# EAGLE board ADP1614_BREAKOUT (EAGLE 7.7.0)
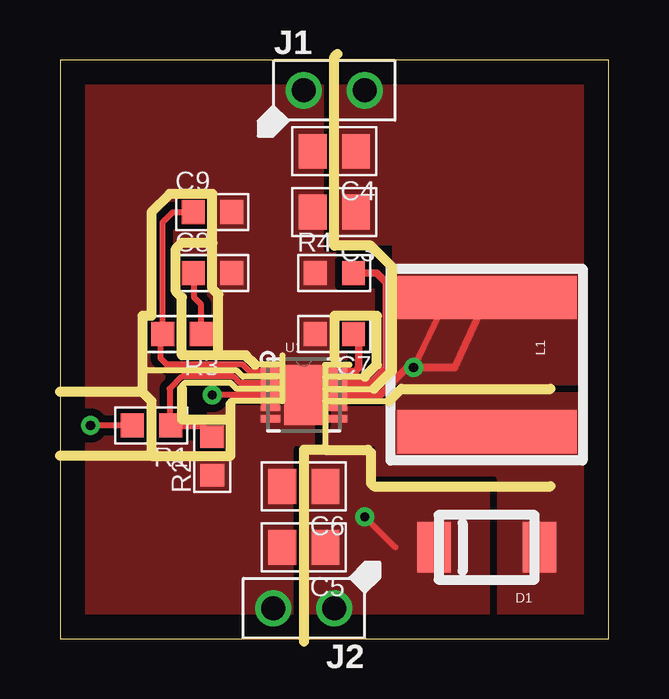
[diagram p0: board, top side]
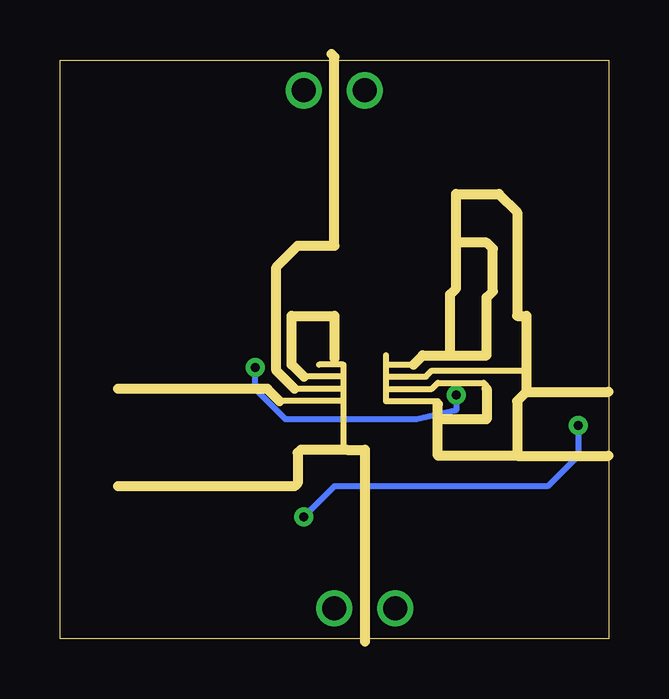
[diagram p1: board, bottom side, seen from below]

Size 22.86 x 24.13 mm. Coordinates in mm from the lower left corner, seen from the top.
Outline: 0,0 22.86,0 22.86,24.13 0,24.13 0,0
Copper layers (1*16): Top 0.035mm / dielectric 1.5mm / Bottom 0.035mm
Design rules "default": minimum track width 10mil, minimum drill 0.6mm, track to track 8mil, track to pad 8mil, pad to pad 8mil, via to via 8mil, smd to smd 8mil, copper to edge 40mil, drill to drill 8mil, minimum pad ring 10mil, minimum via ring 8mil, stop-mask expansion 4mil, vias tented up to drill 0mil, thermal gap 10mil
Milling: 67 lines

## Footprints (pad centres in the part's own frame; a part is rotated, then mirrored left to right if it is on the bottom)
C0805-N = smd 1.15 x 1.45: 1 -0.9,0; 2 0.9,0
C0603-N = smd 0.95 x 1: 1 -0.8,0; 2 0.8,0
SOD128 = smd 1.4 x 2.1: A-2 -2.2,0; C-1 2.2,0
PTH_2.54MM_01X02 = drill 1: P$1 -1.27,0; P$2 1.27,0
L8080 = smd 1.8 x 7.5: 1 -2.8,0; 2 2.8,0
R0603-N = smd 0.95 x 1: 1 -0.8,0; 2 0.8,0
DFN300X300X80-11N = smd 0.813 x 0.305: 1 -1.397,0.991; 2 -1.397,0.508; 3 -1.397,0; 4 -1.397,-0.508; 5 -1.397,-0.991; 6 1.397,-0.991; 7 1.397,-0.508; 8 1.397,0; 9 1.397,0.508; 10 1.397,0.991 | smd 1.651 x 2.489: 11 0,0

## Placement (x,y rotation side)
C3  10uF  [C0805-N]  11.43,17.78 180 top
C4  10uF 16V  [C0805-N]  11.43,20.32 180 top
C5  10uF 25V  [C0805-N]  10.16,3.81 180 top
C6  10uF  [C0805-N]  10.16,6.35 180 top
C7  47nF 50v (100nF)  [C0603-N]  11.43,12.7 180 top
C8  22nF 50v (20nF)  [C0603-N]  6.35,15.24 0 top
C9  33pF 50v  [C0603-N]  6.35,17.78 0 top
D1  DIODE-SCHOTTKYSOD128  [SOD128]  17.78,3.81 180 top
FRAME1  FRAME-LETTER  [CREATIVE_COMMONS]  -101.6,1.27 0 top  (outside the outline)
J1  MF-CON-2.54mm-01x02  [PTH_2.54MM_01X02]  11.43,22.86 0 top
J2  MF-CON-2.54mm-01x02  [PTH_2.54MM_01X02]  10.16,1.27 180 top
L1  4.7uH 4.3A  [L8080]  17.78,11.43 270 top
R1  42.208k (43k)  [R0603-N]  3.81,8.89 180 top
R2  10k  [R0603-N]  6.35,7.62 90 top
R3  2k  [R0603-N]  5.08,12.7 180 top
R4  66.5k (68k)  [R0603-N]  11.43,15.24 0 top
U1  ADP1614  [DFN300X300X80-11N]  10.16,10.16 0 top

## Library data of the parts
C3-C9 R1-R4 = My_Passives
D1 = My_Descrete_Semiconductors
FRAME1 = My_Aesthetics
J1 J2 = My_Connectors; HOUSEPART: YES; MPN: MF-CON-2.54mm-01x02; POPULATE: 1; URL: https://factory.macrofab.com/part/MF-CON-2.54mm-01x02
L1 = My_Passives; PARTNO: NRS8040T100MJGJ
U1 = My_IC_Power

## Nets
GND: C3.2 C4.2 C5.2 C6.2 C7.2 C8.2 C9.2 J1.P$1 J2.P$2 R2.1 R4.1 U1.4 U1.5 U1.11
N$3: R4.2 U1.9
N$4: C7.1 U1.10
N$6: C8.1 R3.1
N$8: C9.1 R3.2 U1.1
N$11: R1.1 R2.2 U1.2
N$13: D1.A-2 L1.2 U1.6 U1.7
VIN: C3.1 C4.1 J1.P$2 L1.1 U1.3 U1.8
VOUT: C5.1 C6.1 D1.C-1 J2.P$1 R1.2

## Tracks (layer width: path | path; a pad name or v marks a point on that pad's centre or on a via)
GND
  pour Top (isolate 0.305, rank 6, no thermals): 0,0 22.86,0 22.86,24.13 0,24.13
N$3
  Top 0.305: U1.9 12.95,10.67 13.59,11.3 13.59,14.86 13.21,15.24 R4.2
N$4
  Top 0.305: U1.10 12.29,11.15 12.45,11.3 12.45,12.48 C7.1
N$6
  Top 0.254: R3.1 5.88,13.93 5.59,14.22 5.59,15.2 C8.1
N$8
  Top 0.254: U1.1 7.9,11.15 7.62,11.43 4.45,11.43 4.19,11.68 4.19,12.61 R3.2 4.28,17.36 4.7,17.78 C9.1
N$11
  Top 0.254: U1.2 7.49,10.67 7.24,10.92 5.08,10.92 4.57,10.41 4.57,8.93 R1.1
  Top 0.305: R1.1 5.88,8.89 R2.2
N$13
  pour Top (isolate 0.305, rank 4, no thermals): 11.05,9.65 13.84,9.65 14.35,10.16 22.86,10.16 22.86,0 17.78,0 17.78,6.35 11.05,6.35
VIN  (via drill 0.38)
  Top 0.254: U1.3 v6.35,10.16 | v14.73,11.3 16,13.97 16.38,13.59
  Top 0.305: U1.8 13.34,10.16 14.48,11.3 16.45,11.3 L1.1
  Bottom 0.254: v6.35,10.16 6.35,9.53 8,9.14 13.46,9.14 14.73,10.41 v14.73,11.3
  pour Top (isolate 0.305, rank 5, no thermals): 22.86,10.16 13.97,10.16 13.97,16.51 11.43,16.51 11.43,24.13 22.86,24.13
VOUT  (via drill 0.38)
  Top 0.254: R1.2 v1.27,8.89 | v12.7,5.08 13.97,3.81
  Bottom 0.254: v1.27,8.89 1.27,7.62 2.54,6.35 11.43,6.35 v12.7,5.08
  pour Top (isolate 0.305, rank 3, no thermals): 10.16,0 10.16,7.62 12.7,7.62 12.7,6.35 17.78,6.35 17.78,0